# EAGLE board smdTest (EAGLE 7.2.0)
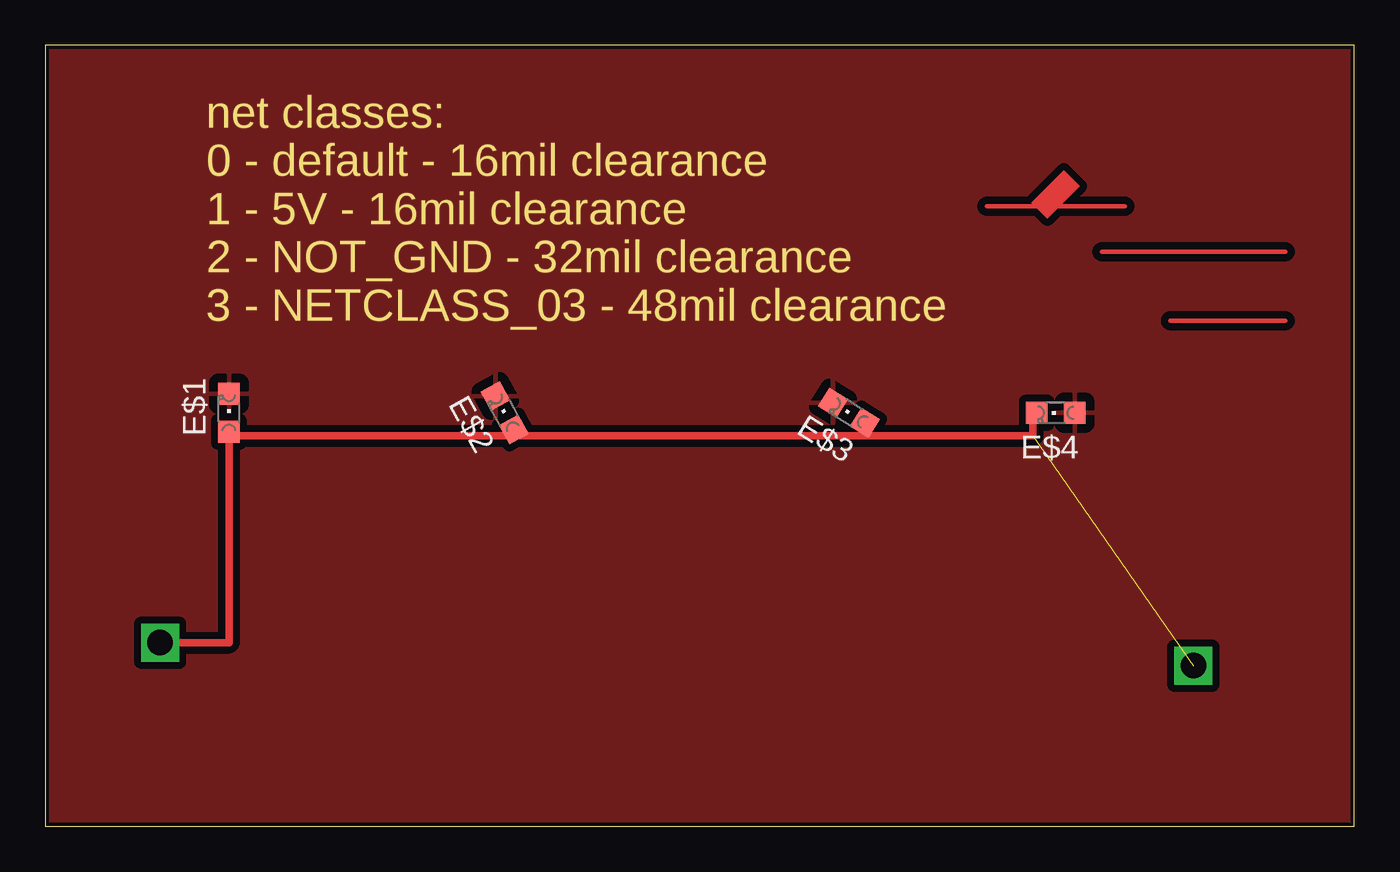
[diagram p0: board, top side]

Size 72.39 x 43.18 mm. Coordinates in mm from the lower left corner, seen from the top.
Outline: 0,0 72.39,0 72.39,43.18 0,43.18 0,0
Copper layers (1*16): Top 0.035mm / dielectric 1.5mm / Bottom 0.035mm
Design rules "default *": minimum track width 10mil, minimum drill 24mil, track to track 8mil, track to pad 8mil, pad to pad 8mil, via to via 8mil, smd to smd 8mil, copper to edge 8mil, drill to drill 8mil, minimum pad ring 10mil, minimum via ring 8mil, stop-mask expansion 4mil, vias tented up to drill 0mil, thermal gap 20mil
Net classes: 0 default: clearance 0.406 mm; 1 5V: clearance 0.406 mm; 2 NOT_GND: clearance 0.813 mm; 3 NETCLASS_03: clearance 1.219 mm

## Footprints (pad centres in the part's own frame; a part is rotated, then mirrored left to right if it is on the bottom)
CHIPLED_0805 = smd 1.2 x 1.2: A 0,-1.05; C 0,1.05

## Placement (x,y rotation side)
E$1  [CHIPLED_0805]  10.16,22.86 0 top
E$2  [CHIPLED_0805]  25.4,22.86 29 top
E$3  [CHIPLED_0805]  44.45,22.86 58 top
E$4  [CHIPLED_0805]  55.88,22.86 90 top

## Library data of the parts
E$1-E$4 = adafruit

## Nets
GND: E$1.C E$2.C E$3.C E$4.A

## Tracks (layer width: path | path; a pad name or v marks a point on that pad's centre or on a via)
5V  (via drill 1.4)  (1 unrouted)
  Top 0.406: v6.35,10.16 10.16,10.16 10.16,21.59 54.61,21.59 54.61,22.86
  other vias: 63.5,8.89
GND
  pour Top: -3.81,46.99 74.93,46.99 74.93,-2.54 -3.81,-2.54
S$1
  Top 0.254: 58.42,31.75 68.58,31.75
S$2
  Top 0.254: 62.23,27.94 68.58,27.94
S$3
  Top 0.254: 52.07,34.29 59.69,34.29
(copper drawn outside any net)
  shapes: Top area x1

## Text on the board
Dimension: net classes: / 0 - default - 16mil clearance / 1 - 5V - 16mil clearance / 2 - NOT_GND - 32mil clearance / 3 - NETCLASS_03 - 48mil clearance